# Altium PCB FSM.PcbDoc
Units mm, origin at the board's own origin, x right, y up, seen from the top; angles counter-clockwise.
Board outline 50.25 x 50.29 mm, 2 copper layers (Top Layer, Bottom Layer); 19 components, 18 nets, 81 pads, 27 vias.
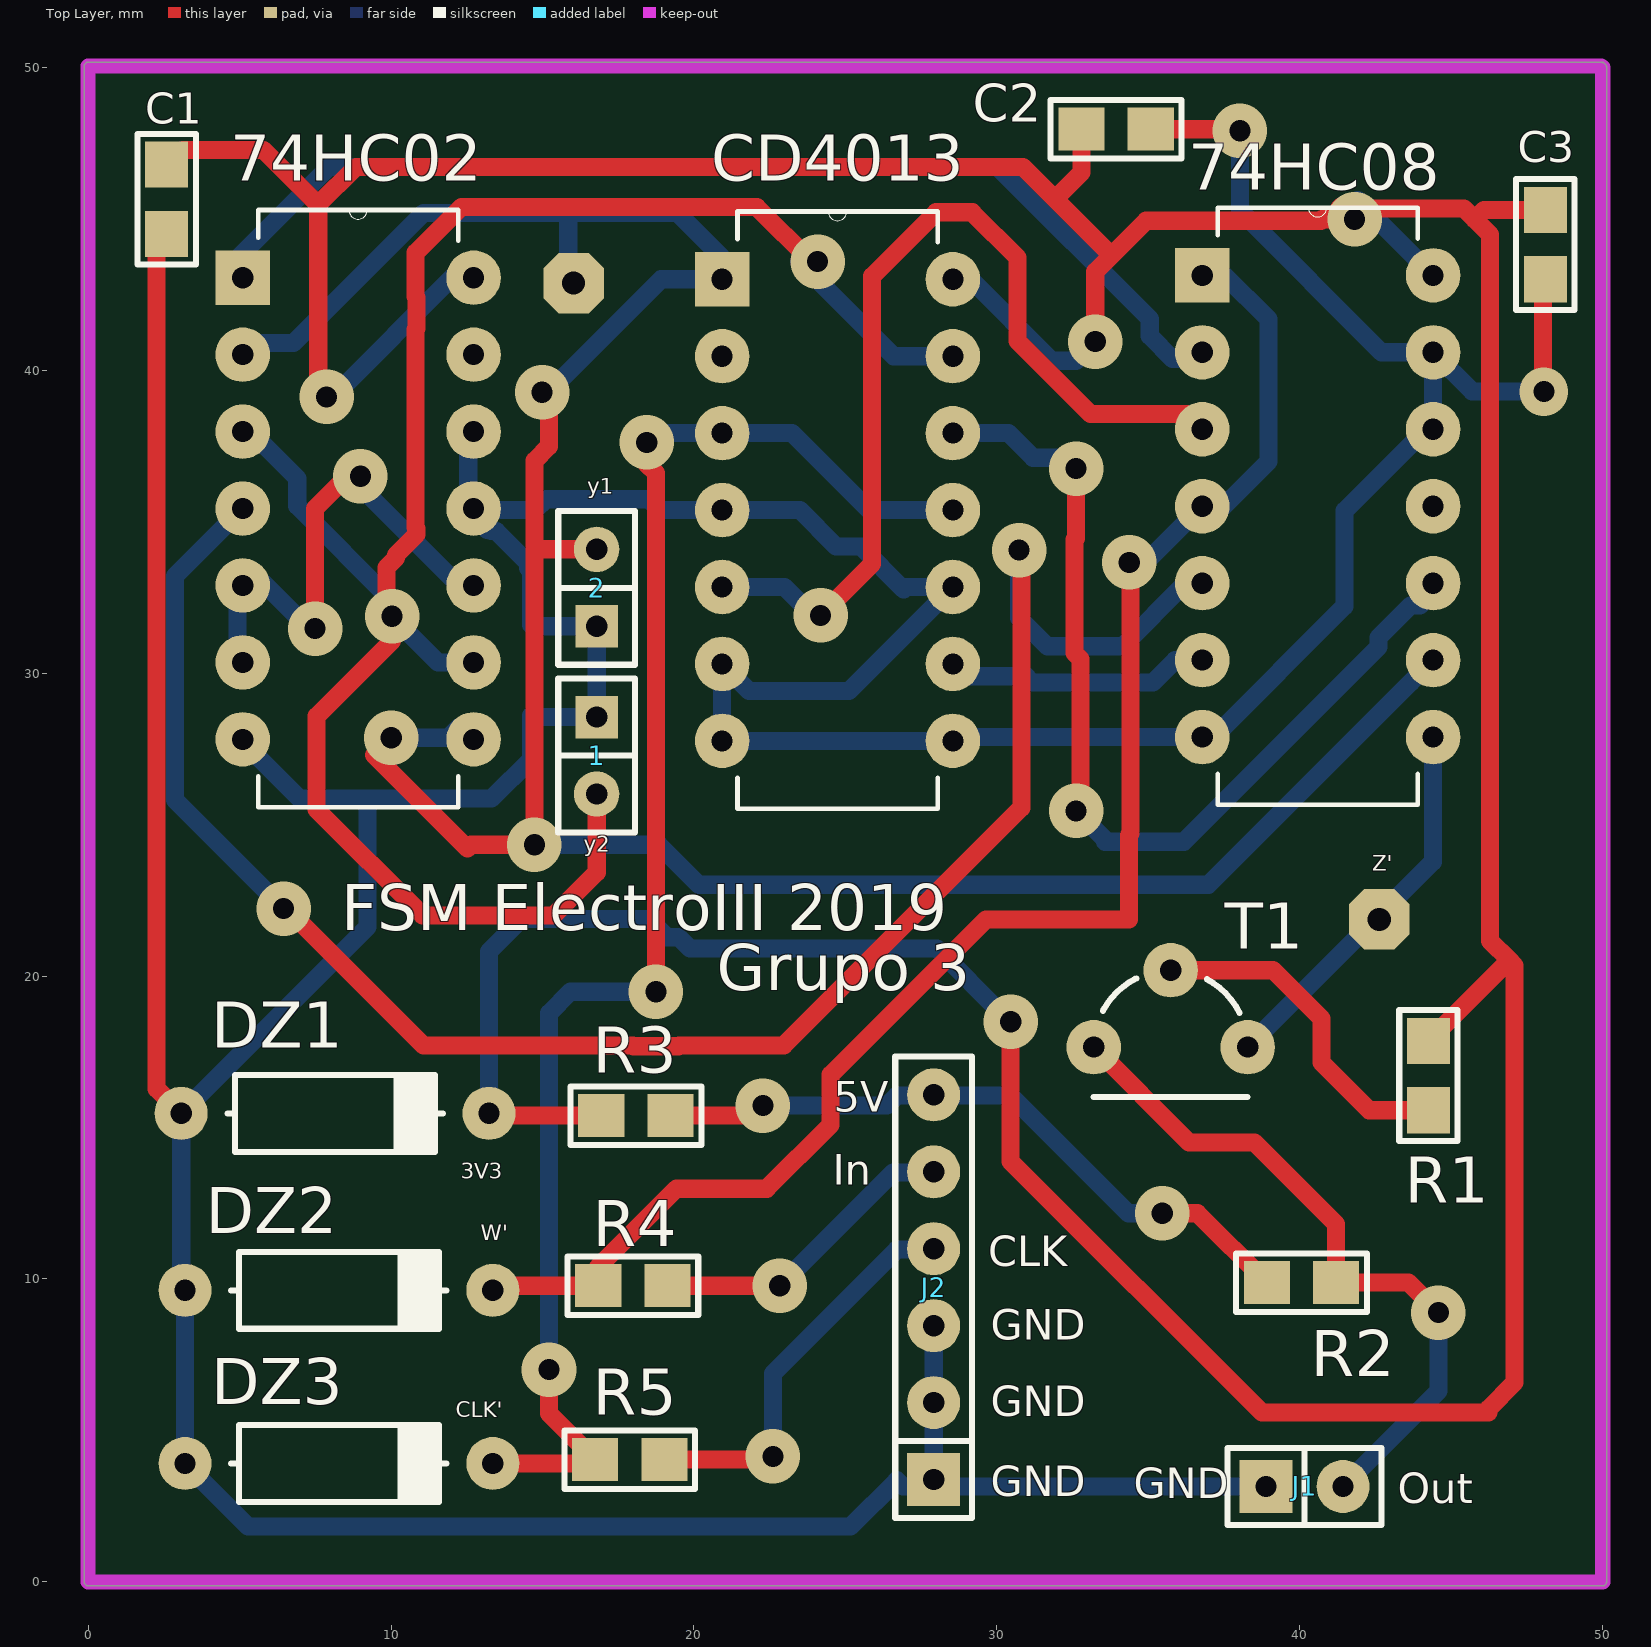
[diagram p0: Top Layer view]
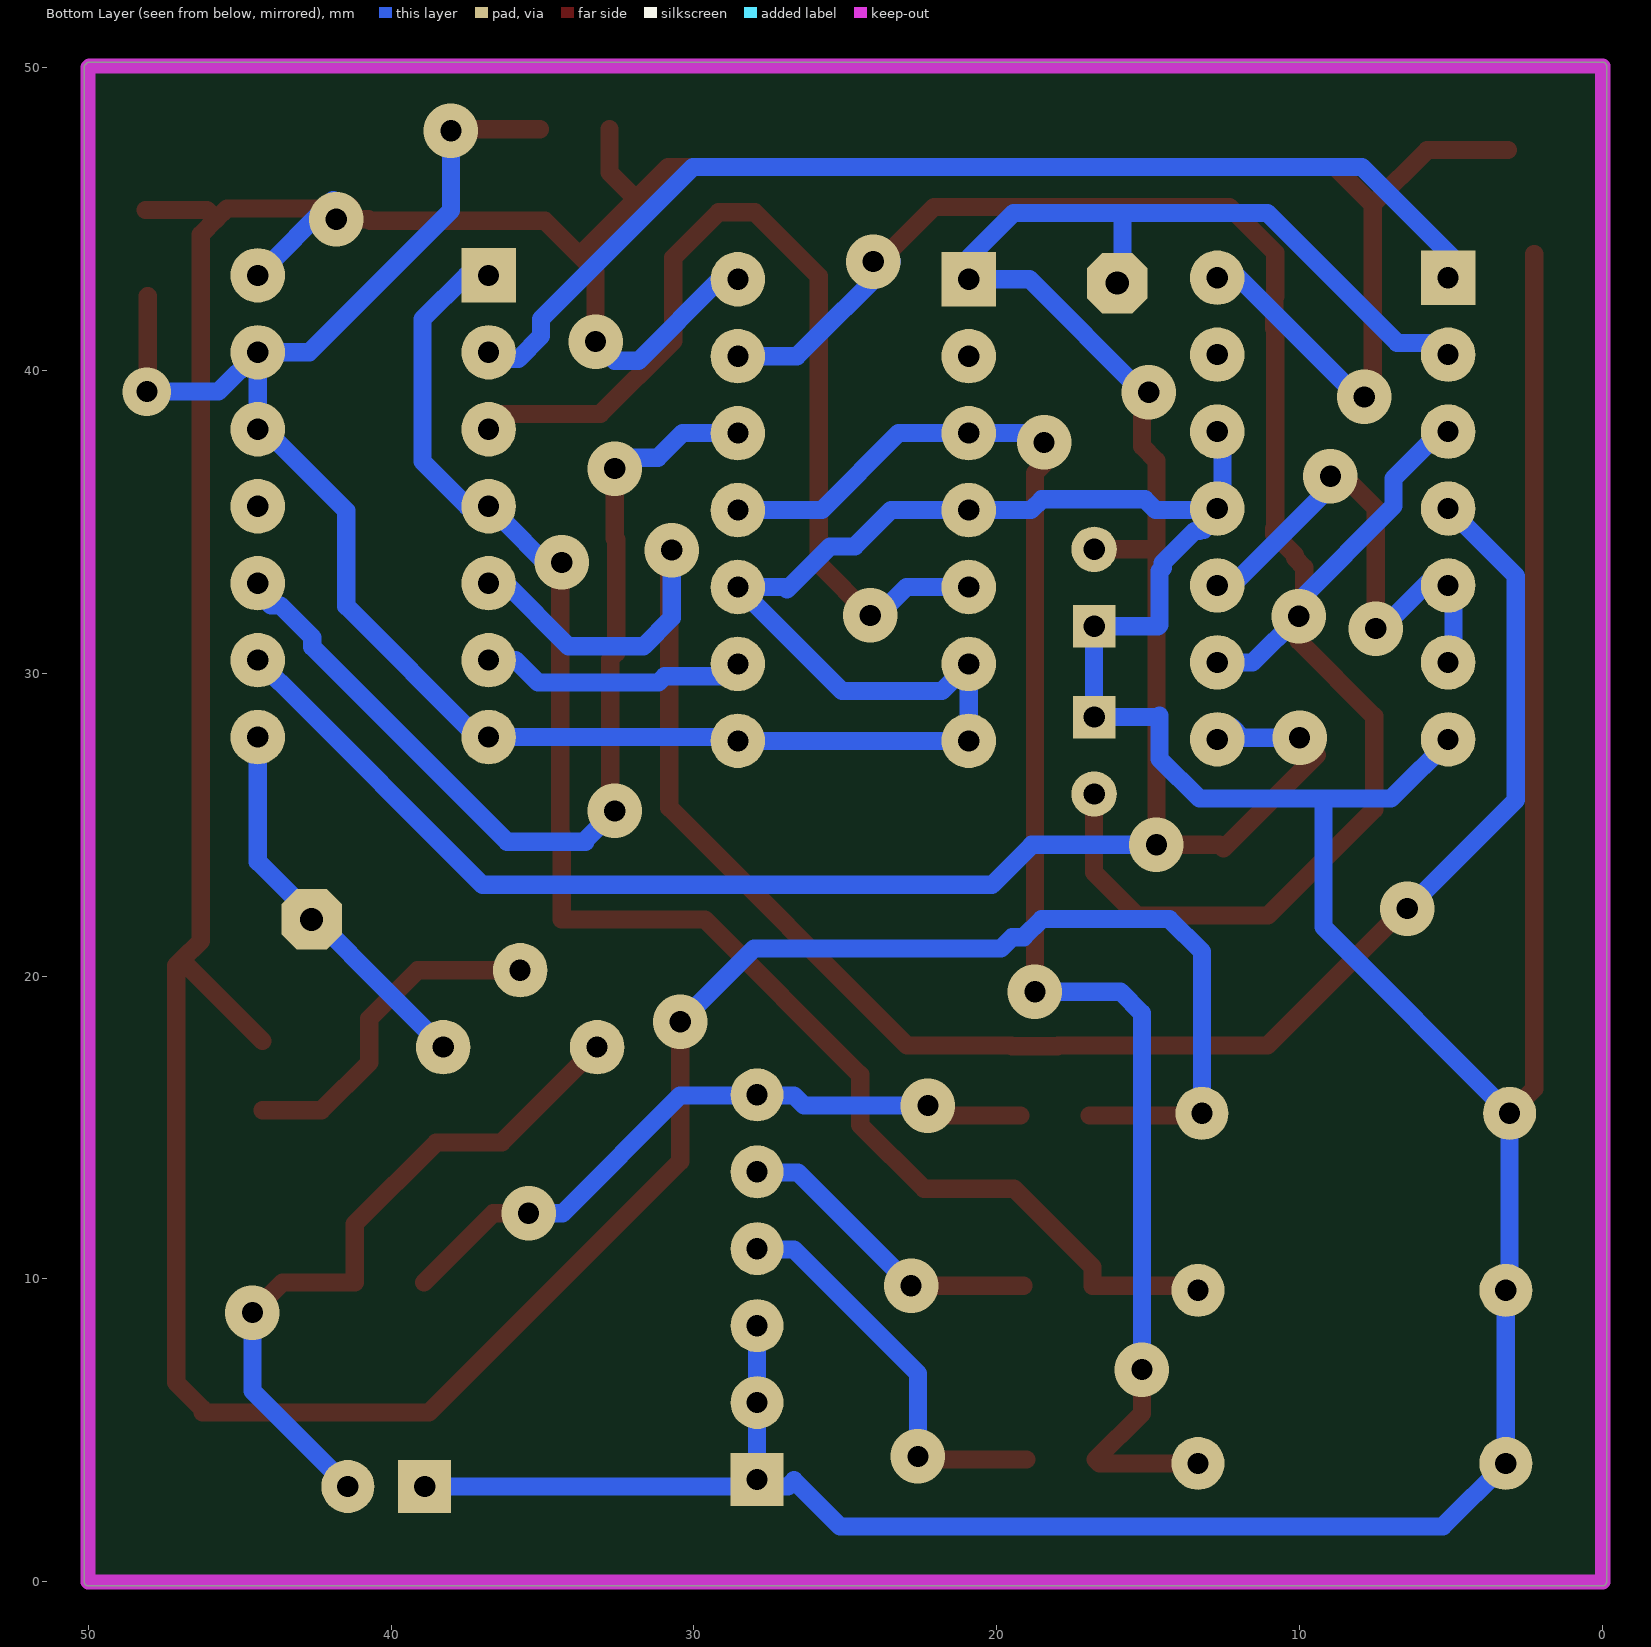
[diagram p1: Bottom Layer view, seen from below]

## Layer stack, top to bottom
Top Solder: solder mask 0.0102, Solder Resist, Dk 3.5
Top Layer: signal copper 0.0356
Dielectric 1: dielectric 0.32, FR-4, Dk 4.8
Bottom Layer: signal copper 0.0356
Bottom Solder: solder mask 0.0102, Solder Resist, Dk 3.5

## Board outline
-0.127,0 ccw(c0,0) 0,-0.127 50,-0.127 ccw(c50,0) 50.127,0 50.127,50 ccw(c50,50) 50.069,50.107 ccw(c49.962,50.038) 49.962,50.165 0,50.165 ccw(c0,50.038) -0.127,50.038

## Design rules (kind name [scope] priority, off if disabled: settings)
Clearance [All] p1: gap=0.6 ignorepadtopadclearanceinfootprint=FALSE
PolygonConnect [All] p1: connectstyle=Relief reliefconductorwidth=0.254 reliefentries=4 polygonreliefangle="90 Angle" airgapwidth=0.254
RoutingVias [All] p1: holewidth=0.711 width=1.27 viastyle="Through Hole" minholewidth=0.711 minwidth=1.27 maxholewidth=0.711 maxwidth=1.27
SolderMaskExpansion [All] p1: expansion=0.102
Width [All] p1: maxlimit=0.6 minlimit=0.6 preferedwidth=0.6
30 further rules are at their usual default settings.

## Classes and differential pairs
component class U_FSM: 74HC02 74HC08 C1 C2 C3 CD4013
component class Casing: DZ1 DZ2 DZ3 J2 R1 R2 R3 R4 R5 T1

## Components (designator, comment, footprint, x,y, rotation, side; value= is the part's Value field where it differs from the comment)
1 "CON2" SIP2#1 16.789,27.28 r270 top (schematic designator J1)
2 "CON2" SIP2#1 16.789,32.817 r90 top (schematic designator J1)
74HC02 "SN74HC02N" *DIP254P762X508-14 12.725,27.813 r0 top (schematic designator U3)
74HC08 "SN74HC08N" *DIP254P762X508-14 44.399,27.889 r0 top (schematic designator U1)
C1 "CAP" 0805 2.591,45.644 r270 top
C2 "CAP" 0805 33.934,47.955 r0 top
C3 "CAP" 0805 48.108,44.145 r270 top
CD4013 "CD4013BE" *DIP254P762X508-14 28.55,27.762 r0 top (schematic designator U2)
DZ1 "DIODO ZENER" DO41 8.153,15.469 r0 top
DZ2 "DIODO ZENER" DO41 8.28,9.627 r0 top
DZ3 "DIODO ZENER" DO41 8.28,3.912 r0 top
J1 "CON2" SIP2#2 40.157,3.15 r0 top
J2 "CON6" SIP6 27.915,3.378 r90 top
R1 "2k2" 0805 44.247,16.713 r90 top
R2 "6k8" 0805 40.056,9.881 r180 top
R3 "100" 0805 18.085,15.392 r180 top
R4 "100" 0805 17.983,9.779 r180 top
R5 "100" 0805 17.882,4.039 r180 top
T1 "TRANSISTOR NPN" TO92 35.738,18.923 r180 top

## Footprints (in the part's own frame and the unit in brackets; to place one, negate y for a bottom-side part, rotate by r counter-clockwise, add the part's x,y. Pads: shape width x height; smd on the part's side, far side on the other; paste and mask are expansions set on the pad)
0805 [mil] "Pasivo 0805"
  rect 60x56 smd: 1(-45,0) 2(45,0)
  silkscreen extent -85,-38 85,38, body extent -40,-25 39,25, height 15
*DIP254P762X508-14 [mm]
  rect 1.8x1.8 hole 0.7: 1(-7.62,15.24)
  round 1.8 hole 0.7: 2(-7.62,12.7) 3(-7.62,10.16) 4(-7.62,7.62) 5(-7.62,5.08) 6(-7.62,2.54) 7(-7.62,0) 8(0,0) 9(0,2.54) 10(0,5.08) 11(0,7.62) 12(0,10.16) 13(0,12.7) 14(0,15.24)
  silkscreen extent -7.11,-2.24 -0.51,17.48
DO41 [mm]
  round 1.75 hole 0.7: 1(-5.08,0) 2(5.08,0)
  silkscreen extent -3.56,-1.27 3.56,1.27, body extent -5.46,-1.19 5.46,1.37, height 2.03
SIP2#1 [mm]
  rect 1.4x1.4 hole 0.7: 1(-1.27,0)
  round 1.5 hole 0.7: 2(1.27,0)
  silkscreen extent -2.54,-1.27 2.54,1.27
SIP2#2 [mm]
  rect 1.75x1.75 hole 0.7: 1(-1.27,0)
  round 1.75 hole 0.7: 2(1.27,0)
  silkscreen extent -2.54,-1.27 2.54,1.27
SIP6 [mm]
  rect 1.75x1.75 hole 0.7: 1(0,0)
  round 1.75 hole 0.7: 2(2.54,0) 3(5.08,0) 4(7.62,0) 5(10.16,0) 6(12.7,0)
  silkscreen extent -1.27,-1.27 13.97,1.27, body extent -1.27,-1.3 13.97,1.24, height 8.38
TO92 [mm]
  round 1.8 hole 0.7: 1(0,-1.27) 2(2.54,1.27) 3(-2.54,1.27)
  silkscreen extent -2.54,-1 2.54,2.92, body extent -2.79,-1.55 2.79,2.79, height 8

## Part data
74HC02: "IC: digital; Channels: 4; NOR; Inputs: 2; THT; DIP14; Ser", Package="DIP-14 Texas Instruments", Availability=Unavailable, MF="Texas Instruments", MP=SN74HC02N, Price=None, SnapEDA_Link=https://www.snapeda.com/parts/SN74HC02N/Texas%20Instruments/view-part/?ref=snap
74HC08: "AND Gate 4-Element 2-IN CMOS 14-Pin PDIP Tube", Package="PDIP-14 Signetics", Availability=Unavailable, MF="Texas Instruments", MP=SN74HC08N, Price=None, SnapEDA_Link=https://www.snapeda.com/parts/SN74HC08N/Texas%20Instruments/view-part/?ref=snap
CD4013: "Flip Flop D-Type Pos-Edge 2-Element 14-Pin PDIP", Package="DIP-14 RCA", Availability=Unavailable, MF=Texas, MP=CD4013BE, Price=None, SnapEDA_Link=https://www.snapeda.com/parts/CD4013BE/Texas%20Instruments/view-part/?ref=snap
R1 R2 R3 R4 R5: library part RES

## Free pads (board coordinates)
  oct 2x2 hole 0.762: 2(16.027,42.875) 2(42.621,21.869)

## Via types
v1: diameter 1.8, hole 0.7, Top Layer to Bottom Layer, 26 vias
v2: diameter 1.6, hole 0.7, Top Layer to Bottom Layer, 1 vias

## Nets (pads, with @x,y where several pads share a name; then routed paths per layer and width w, separated by ;. In a path a pad name is that pad's centre, name@x,y a point inside that pad or via, vN(x,y) a via of type N, cw(c..) or ccw(c..) an arc to the next point about the centre after c; other vN are vias at no path point)
3V3: 74HC02.14 74HC08.14 C1.1 C2.1 C3.1 CD4013.14 DZ1.2 R1.2 R3.2 | length 173.2
  Top Layer w0.6: C1.1@3.124,47.269 5.791,47.269 7.595,45.466 ; v1@8.064,39.052 7.595,39.522 7.595,45.466 ; DZ1.2 13.31,15.392 R3.2 ; v1(30.455,18.491) 30.455,13.882 38.749,5.588 46.228,5.588 46.228,5.715 47.092,6.579 47.092,20.345 46.914,20.523 ; C2.1 32.791,46.533 31.915,45.657 ; v1(33.249,40.945) 33.249,43.256 33.782,43.79 ; R1.2 46.914,20.523 ; C3.1 46.076,45.288 45.771,44.983 ; 7.595,45.466 8.839,46.711 30.861,46.711 31.915,45.657 ; 31.915,45.657 33.782,43.79 ; 33.782,43.79 34.925,44.933 40.691,44.933 40.742,44.983 v1(41.808,44.983) v1@41.453,45.339 ; v1@41.453,45.339 45.415,45.339 45.771,44.983 ; v1@41.453,45.339 41.3,45.339 41.377,45.415 v1@41.453,45.339 ; 45.771,44.983 46.279,44.475 46.279,21.158 46.914,20.523
  Bottom Layer w0.6: v1(7.874,39.116) 8.077,39.116 12.116,43.155 74HC02.14@12.548,43.155 ; DZ1.2 13.233,20.803 14.311,21.88 18.517,21.88 19.116,21.282 19.491,21.282 19.868,20.904 28.016,20.904 v1@30.226,18.694 ; CD4013.14 29.134,43.002 31.826,40.31 v1@32.614,40.31 ; v1(41.808,44.983) 41.808,45.517 41.91,45.618 74HC08.14
5V: J2.6 R2.2 R3.1 | length 22.4
  Top Layer w0.6: R3.1 v1@22.276,15.392 ; v1(35.458,12.167) 36.627,12.167 R2.2
  Bottom Layer w0.6: v1(22.276,15.723) 26.365,15.723 26.695,16.053 30.455,16.053 34.341,12.167 v1(35.458,12.167)
-y2: 74HC08.10 CD4013.12 | length 32.2
  Top Layer w0.6: v1(32.614,25.451) 32.763,25.6 32.763,30.464 32.566,30.66 32.566,34.401 32.614,34.448 v1(32.614,36.754)
  Bottom Layer w0.6: CD4013.12 30.378,37.922 31.191,37.109 v1@32.817,37.109 ; v1(32.614,25.451) 33.579,24.486 33.579,24.435 36.17,24.435 42.599,30.864 42.599,31.175 43.654,32.229 43.964,32.229 44.399,32.664 74HC08.10
CLK: CD4013.3 CD4013.11 DZ3.2 R5.2 | length 52.1
  Top Layer w0.6: DZ3.2 16.612,3.912 R5.2 15.215,5.563 v1(15.215,7.01) ; v1(18.44,37.617) 18.44,36.906 18.745,36.601 v1(18.745,19.482)
  Bottom Layer w0.6: v1(15.215,7.01) 15.215,18.771 15.926,19.482 v1(18.745,19.482) ; v1@18.567,37.541 18.948,37.922 CD4013.3 23.241,37.922 25.781,35.382 CD4013.11
CLK(5V): J2.4 R5.1 | length 13.4
  Top Layer w0.6: R5.1 22.504,4.039 v1(22.606,4.14)
  Bottom Layer w0.6: v1(22.606,4.14) 22.606,6.883 26.695,10.973 27.889,10.973 J2.4
GND': 1.1 2.1 74HC02.7 74HC02.11 74HC02.12 74HC08.7 74HC08.12 74HC08.13 C1.2 C2.2 C3.2 CD4013.4 CD4013.6 CD4013.7 CD4013.8 CD4013.10 DZ1.1 DZ2.1 DZ3.1 J1.1 J2.1 J2.2 J2.3 | length 204.9
  Top Layer w0.6: C1.2@2.261,43.84 2.261,16.281 DZ1.1 ; C2.2 v1@37.516,47.955 ; v2@48.031,39.878 C3.2@48.031,42.443
  Bottom Layer w0.6: 74HC02.7@4.928,27.915 6.985,25.857 9.22,25.857 ; 74HC02.12@12.548,38.075 74HC02.11@12.548,35.535 ; J2.1 J2.2 J2.3 ; CD4013.10 CD4013.10@28.544,32.842 ; v1(38.024,47.904) 38.024,45.268 42.702,40.589 74HC08.13 ; J1.1 26.899,3.15 26.695,3.353 25.171,1.829 5.283,1.829 DZ3.1 DZ2.1 3.073,9.754 DZ1.1 9.22,21.615 9.22,25.857 ; v2(48.057,39.294) 45.695,39.294 74HC08.13 ; 9.22,25.857 13.315,25.857 14.63,27.172 14.63,28.6 14.681,28.55 1.1 2.1 14.681,31.547 14.63,31.598 14.63,33.37 14.525,33.475 14.525,33.639 13.471,34.693 13.307,34.693 13.268,34.733 13.172,34.733 12.548,35.357 74HC02.11@12.548,35.535 ; 74HC02.11@12.548,35.535 12.7,35.382 14.757,35.382 15.113,35.738 18.517,35.738 18.872,35.382 CD4013.4 23.495,35.382 24.695,34.182 25.508,34.182 26.924,32.766 27,32.842 CD4013.10@28.544,32.842 ; CD4013.10@28.544,32.842 25.115,29.413 21.819,29.413 CD4013.6 CD4013.7 CD4013.8 28.677,27.889 74HC08.7 37.16,27.889 41.478,32.207 41.478,35.357 43.801,37.679 44.399,37.679 74HC08.12 74HC08.13
NetR1_1: R1.1 T1.1 | length 11.3
  Top Layer w0.6: T1.1 39.116,20.193 40.716,18.593 40.716,17.145 42.291,15.57 R1.1
NetU1_2: 74HC02.1 74HC08.2 | length 35.8
  Bottom Layer w0.6: 74HC02.1@4.978,43.739 7.95,46.711 30.028,46.711 35.049,41.69 35.049,41.126 35.8,40.375 74HC08.2@36.565,40.375
NetU1_5: 74HC02.4 74HC08.5 | length 63.5
  Top Layer w0.6: v1(6.452,22.225) 6.452,22.327 11.074,17.704 17.978,17.704 18,17.682 19.491,17.682 19.513,17.704 22.962,17.704 30.814,25.556 30.814,33.982 v1(30.734,34.061)
  Bottom Layer w0.6: 74HC02.4 5.1,35.433 2.87,33.203 2.87,25.806 v1(6.452,22.225) ; v1(30.734,34.061) 30.734,31.826 31.674,30.886 34.143,30.886 36.226,32.969 74HC08.5 74HC08.5@36.779,32.842
NetU3_5: 74HC02.5 74HC02.6 74HC02.10 | length 16.7
  Top Layer w0.6: v1(7.493,31.471) 7.493,35.433 v1@8.941,36.881
  Bottom Layer w0.6: 74HC02.6@4.928,30.455 4.928,32.995 5.766,32.995 v1@7.239,31.521 ; v1(8.992,36.5) 8.992,36.144 12.141,32.995 74HC02.10@12.548,32.995
W: 74HC08.1 74HC08.4 DZ2.2 R4.2 | length 53.5
  Top Layer w0.6: DZ2.2 13.513,9.779 R4.2 16.84,10.389 19.431,12.979 22.403,12.979 24.511,15.088 24.511,16.739 29.642,21.869 34.366,21.869 34.366,24.658 34.414,24.705 34.414,33.608 v1(34.366,33.655)
  Bottom Layer w0.6: v1(34.366,33.655) 34.366,33.102 36.774,35.509 74HC08.4 37.49,35.509 38.964,36.982 38.964,41.681 37.516,43.129 74HC08.1
W(5V): J2.5 R4.1 | length 10
  Top Layer w0.6: R4.1 v1@22.504,9.779
  Bottom Layer w0.6: v1(22.835,9.779) 26.568,13.513 27.889,13.513 J2.5
y1: 2.2 74HC02.2 74HC02.8 74HC08.9 CD4013.1 pad.2@16.027,42.875 | length 88.4
  Top Layer w0.6: v1@9.436,27.292 12.522,24.206 12.649,24.333 v1(14.732,24.333) 14.732,34.265 ; v1@15.215,39.751 15.215,37.49 14.732,37.008 14.732,34.265 ; 2.2 14.91,34.087 14.732,34.265
  Bottom Layer w0.6: 74HC02.2@4.928,40.615 5.207,40.894 6.782,40.894 11.074,45.187 15.85,45.187 ; v1(10.008,27.864) 11.887,27.864 12.243,28.219 74HC02.8@12.548,27.915 ; v1(14.732,24.333) 18.847,24.333 20.168,23.012 36.977,23.012 43.654,29.689 43.659,29.689 74HC08.9 ; v1(14.986,39.268) 15.189,39.268 18.923,43.002 CD4013.1 ; pad.2@15.85,43.231 15.85,45.187 ; CD4013.1@20.904,43.739 19.456,45.187 15.85,45.187
y2: 1.2 74HC02.3 74HC02.9 CD4013.13 | length 66.6
  Top Layer w0.6: v1@9.855,32.258 9.855,33.492 10.16,33.796 10.16,33.898 10.846,34.584 10.846,34.778 10.809,34.815 10.809,41.335 10.846,41.371 10.846,42.398 10.809,42.435 10.809,43.875 12.325,45.39 22.073,45.39 v1@23.914,43.548 ; v1(10.033,31.877) 10.033,31.064 7.544,28.575 7.544,25.502 11.049,21.996 15.367,21.996 16.789,23.419 1.2
  Bottom Layer w0.6: 74HC02.3 5.359,37.973 6.905,36.427 6.905,35.513 10.033,32.385 v1(10.033,31.877) 11.557,30.353 74HC02.9 ; 74HC02.9@12.37,30.455 74HC02.9@12.548,30.455 ; v1(24.079,43.586) 23.47,43.586 26.594,40.462 CD4013.13
YY1: 74HC08.3 CD4013.5 | length 31.6
  Top Layer w0.6: v1(24.181,31.902) 25.879,33.601 25.879,43.1 27.991,45.212 29.185,45.212 30.683,43.713 30.683,40.965 33.094,38.554 36.275,38.554 74HC08.3
  Bottom Layer w0.6: CD4013.5 22.987,32.842 v1@23.927,31.902
YY2: 74HC08.6 CD4013.9 | length 8.8
  Bottom Layer w0.6: CD4013.9 28.956,29.896 30.967,29.896 31.177,29.686 35.147,29.686 35.89,30.429 74HC08.6
Z: 74HC08.8 pad.2@42.621,21.869 T1.3 | length 12.8
  Bottom Layer w0.6: T1.3 44.399,23.774 74HC08.8
Z(5V): J1.2 R2.1 T1.2 | length 23.2
  Top Layer w0.6: T1.2 36.347,14.503 38.506,14.503 41.199,11.811 R2.1 43.586,9.881 v1(44.577,8.89)
  Bottom Layer w0.6: J1.2 44.577,6.299 v1(44.577,8.89)
pads on no net: 74HC02.13 74HC08.11 CD4013.2

## Keep-outs
Keep-Out Layer:
  lines w0.5: 0,0 0,50.038 49.962,50.038 50,50 50,0 0,0

## Silkscreen, mask and mechanical layers (free items; w line width, h text height)
Top Overlay:
  text "y1" at 16.485,35.916 h0.52
  text "y2" at 16.358,24.105 h0.52
  text "Z'" at 42.393,23.47 h0.52
  text "FSM ElectroIII 2019" at 8.357,21.514 h1.52
  text "Grupo 3" at 20.752,19.533 h1.52
  text "5V" at 24.613,15.519 h1
  text "3V3" at 12.294,13.31 h0.52
  text "In" at 24.587,13.106 h1
  text "W'" at 12.954,11.278 h0.52
  text "CLK" at 29.718,10.414 h1
  text "GND" at 29.794,8.001 h1
  text "GND" at 29.794,5.461 h1
  text "CLK'" at 12.141,5.436 h0.52
  text "GND" at 29.794,2.819 h1
  text "GND" at 34.519,2.769 h1
  text "Out" at 43.231,2.591 h1